# EAGLE board MicroIMU (EAGLE 7.6.0)
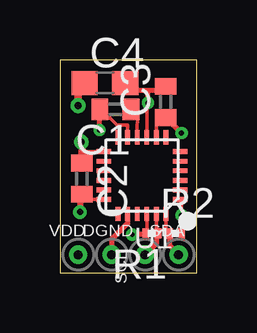
[diagram p0: board, top side]
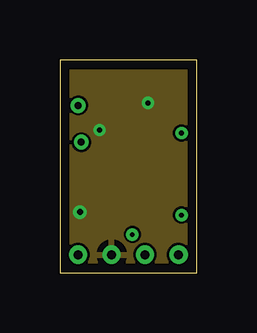
[diagram p1: board, inner layer Route2]
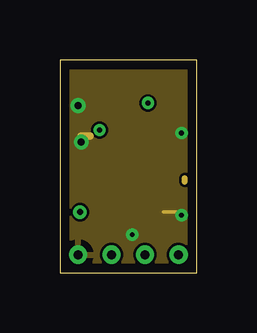
[diagram p2: board, inner layer Route15]
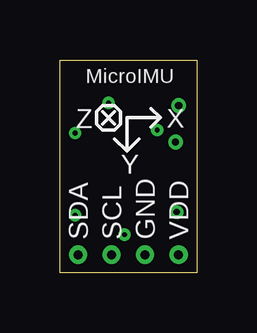
[diagram p3: board, bottom side, seen from below]

Size 5.71 x 8.89 mm. Coordinates in mm from the lower left corner, seen from the top.
Outline: 0,0 5.71,0 5.71,8.89 0,8.89 0,0
Copper layers (1*2*15*16): Top 0.035559375mm / dielectric 0.17018125mm / Route2 0.01778125mm / dielectric 47mil / Route15 0.01778125mm / dielectric 0.17018125mm / Bottom 0.035559375mm
Design rules "OSHPark-4layer *": minimum track width 4mil, minimum drill 0.2mm, track to track 4mil, track to pad 4mil, pad to pad 4mil, via to via 4mil, smd to smd 4mil, copper to edge 15mil, drill to drill 6mil, minimum pad ring 6mil, minimum via ring 6mil, stop-mask expansion 2.5mil, vias tented up to drill 12mil, thermal gap 10mil

## Footprints (pad centres in the part's own frame; a part is rotated, then mirrored left to right if it is on the bottom)
C0402 = smd 0.7 x 0.9: 1 -0.65,0; 2 0.65,0
C0603 = smd 1.1 x 1: 1 -0.85,0; 2 0.85,0
30MIL/15MIL = drill 0.381 pad 0.762: P$1 0,0
R0201 = smd 0.28 x 0.43: 1 -0.255,0; 2 0.255,0
LEAD-QFN24 = smd 0.6 x 0.2: 1 -1.6,1; 2 -1.6,0.6; 3 -1.6,0.2; 4 -1.6,-0.2; 5 -1.6,-0.6; 6 -1.6,-1; 13 1.6,-1; 14 1.6,-0.6; 15 1.6,-0.2; 16 1.6,0.2; 17 1.6,0.6; 18 1.6,1 | smd 0.2 x 0.6: 7 -1,-1.6; 8 -0.6,-1.6; 9 -0.2,-1.6; 10 0.2,-1.6; 11 0.6,-1.6; 12 1,-1.6; 19 1,1.6; 20 0.6,1.6; 21 0.2,1.6; 22 -0.2,1.6; 23 -0.6,1.6; 24 -1,1.6

## Placement (x,y rotation side)
C1  0.1uF  [C0402]  2.31,6.83 180 top
C2  0.1uF  [C0402]  0.92,3.94 270 top
C3  10nF  [C0402]  4.42,7.14 90 top
C4  10uF  [C0603]  1.88,7.92 0 top
DGND  [30MIL/15MIL]  2.16,0.76 0 top
R1  10k  [R0201]  3.84,1.65 180 top
R2  10k  [R0201]  4.83,1.65 0 top
SCL  [30MIL/15MIL]  3.56,0.76 90 top
SDA  [30MIL/15MIL]  4.95,0.76 0 top
U1  [LEAD-QFN24]  3.43,4.06 180 top
VDD  [30MIL/15MIL]  0.76,0.76 0 top

## Library data of the parts
C1-C4 R1 R2 = resistor
DGND SCL SDA VDD = michael-stetner
U1 = Grove - IMU 10DOF v1.1

## Nets
DGND: C1.2 C2.2 C3.2 C4.2 DGND.P$1 U1.9 U1.11 U1.18 U1.20
N$7: C1.1 U1.10
SCL: R1.1 SCL.P$1 U1.23
SDA: R2.1 SDA.P$1 U1.24
VDD: C2.1 C3.1 C4.1 R1.2 R2.2 U1.1 U1.8 U1.13 U1.22 VDD.P$1

## Tracks (layer width: path | path; a pad name or v marks a point on that pad's centre or on a via)
AGND
  Route15 0.254: 5.21,3.96 5.21,3.81
DGND  (via drill 0.2, 0.25)
  Top 0.152: C2.2 0.92,3.06 U1.18 0.84,3.05 | 1.76,6.68 C1.2 1.73,6.8 2.04,6.5 2.39,6.17 2.83,6.17 U1.11 | U1.9 3.63,7.09 v3.68,7.09
  Top 0.203: C4.2 2.73,7.62 3.68,7.62 | v1.65,5.97 1.65,6.5 2.04,6.5 | U1.20 2.83,2.07 2.16,1.4 DGND.P$1 | 3.68,7.62 4.42,7.62 C3.2 | v3.68,7.09 3.68,7.62
  Top 0.254: 0.84,3.05 v0.84,2.54
  pour Route2: 0,9.02 0,0 5.71,0 5.71,9.02
N$7
  Top 0.152: U1.10 3.23,6.8 C1.1
SCL
  Top 0.152: 4.02,2.46 U1.23 4.03,1.69 R1.1
  Top 0.203: 4.03,1.69 4.03,1.24 SCL.P$1
SDA
  Top 0.152: R2.1 4.43,1.66 U1.24
  Top 0.203: R2.1 4.57,1.14 SDA.P$1
VDD  (via drill 0.2, 0.3)
  Top 0.152: U1.8 4.02,5.66 | U1.8 4.03,6.75 C3.1 | U1.13 0.92,5.06 | U1.8 4.04,6.2 | U1.22 3.63,1.68 R1.2 | C4.1 0.76,7.65 | R2.2 v5.08,2.41 5.08,3.06 U1.1
  Top 0.203: v5.08,5.84 4.43,6.48 C3.1 | R1.2 3.56,1.6 v3.02,1.6
  Top 0.305: C2.1 0.92,5.06 0.92,5.46 v0.89,5.46 | 0.76,7.65 v0.76,6.99
  Route15 0.152: v0.76,6.99 0.89,6.99 0.89,6.86 | v5.08,2.41 5.08,2.54 4.32,2.54
  Route15 0.305: v0.89,5.46 0.89,5.71 1.27,5.71
  pour Route15: 0,0 5.71,0 5.71,9.02 0,9.02

## Text on the board
bPlace: MicroIMU | X | Z | Y | VDD | GND | SCL | SDA